# EAGLE board espduino-12 (EAGLE 7.1.0)
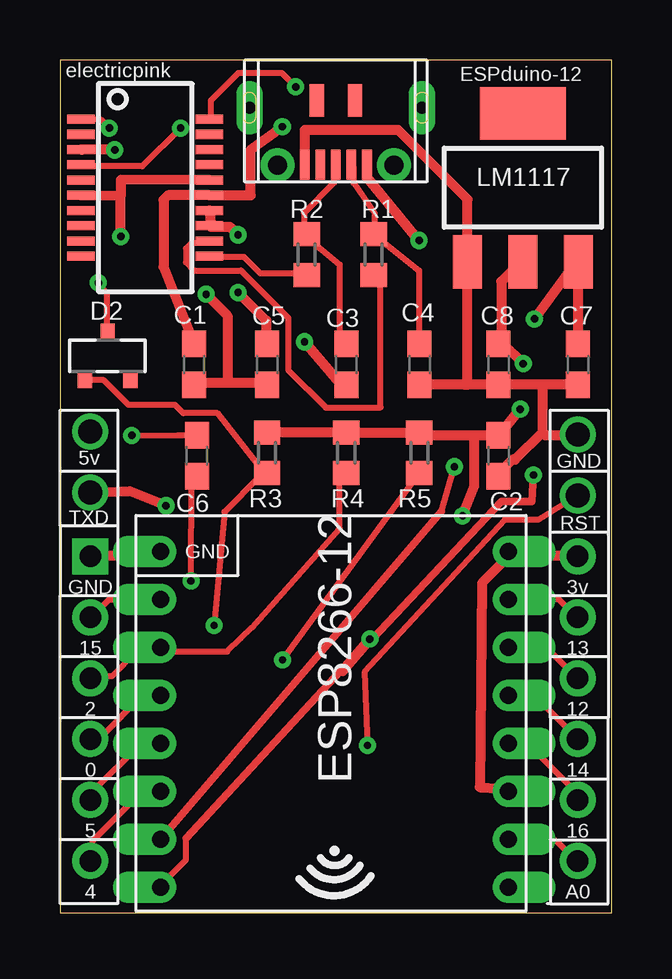
[diagram p0: board, top side]
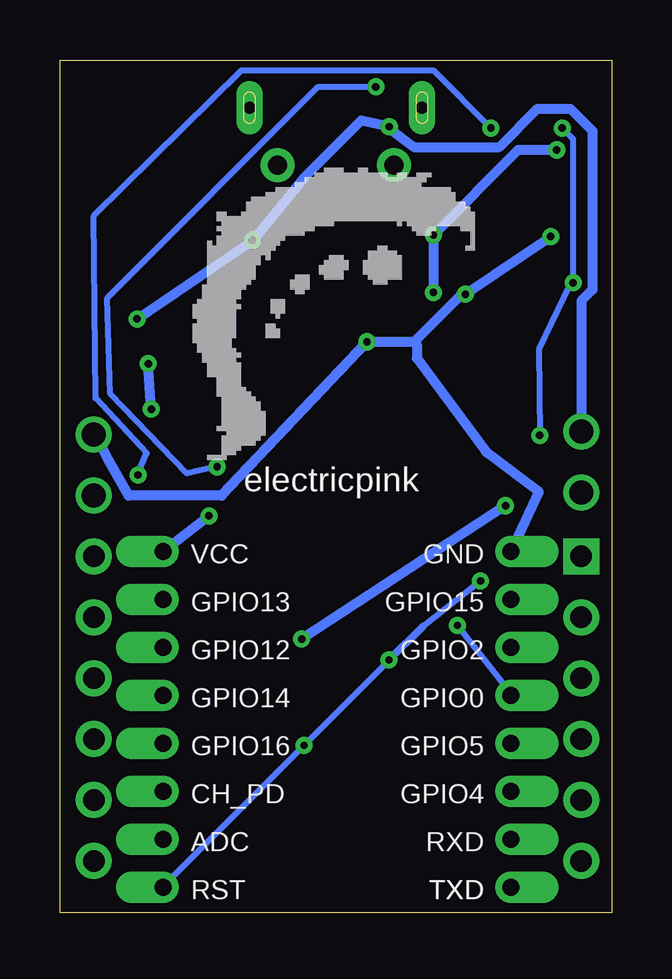
[diagram p1: board, bottom side, seen from below]

Size 23 x 35.55 mm. Coordinates in mm from the lower left corner, seen from the top.
Outline: 0,0 23,0 23,35.55 0,35.55 0,0
Copper layers (1*16): Top 0.035mm / dielectric 1.5mm / Bottom 0.035mm
Design rules "SeeedStudio_2layer_conservative": minimum track width 8mil, minimum drill 12mil, track to track 8mil, track to pad 8mil, pad to pad 8mil, via to via 8mil, smd to smd 0mil, copper to edge 12mil, drill to drill 12mil, minimum pad ring 12mil, minimum via ring 8mil, stop-mask expansion 2mil, vias tented up to drill 100mil, thermal gap 12mil
Net classes: 0 default: width 0.254 mm; 1 POWER: width 0.406 mm

## Footprints (pad centres in the part's own frame; a part is rotated, then mirrored left to right if it is on the bottom)
C0603 = smd 1.1 x 1: 1 -0.85,0; 2 0.85,0
SOT23-R = smd 0.6 x 0.7: 1 -0.95,-1; 2 0.95,-1; 3 0,1
ESP8266-12-EXT-HEADERS = drill 0.711 pad 1.2 offset: ADC 2.895,11.791; CH_PD 2.895,9.791; GND 17.395,-0.209; GPIO0 17.395,5.791; GPIO2 17.395,3.791; GPIO4 17.395,9.791; GPIO5 17.395,7.791; GPIO12 2.895,3.791; GPIO13 2.895,1.791; GPIO14 2.895,5.791; GPIO15 17.395,1.791; GPIO16 2.895,7.791; RESET 2.895,13.791; RX 17.395,11.791; TX 17.395,13.791; VCC 2.895,-0.209 | drill 0.889 pad 1.5: ADC_P 0,12.7; GPIO0_P 20.32,7.62; GPIO2_P 20.32,5.08; GPIO4_P 20.32,12.7; GPIO5_P 20.32,10.16; GPIO12_P 0,5.08; GPIO13_P 0,2.54; GPIO14_P 0,7.62; GPIO15_P 20.32,2.54; GPIO_16_P 0,10.16; VCC_P 0,0 | drill 0.889 pad 1.5 square: GND_P 20.32,0
SOT223 = smd 1.219 x 2.235: 1 -2.311,-3.099; 2 0,-3.099; 3 2.311,-3.099 | smd 3.6 x 2.2: 4 0,3.099
R0603 = smd 1 x 1.1: 1 -0.85,0; 2 0.85,0
SSOP20_L = smd 0.381 x 1.143: 1 -2.857,-2.68; 2 -2.223,-2.68; 3 -1.587,-2.68; 4 -0.953,-2.68; 5 -0.318,-2.68; 6 0.318,-2.68; 7 0.953,-2.68; 8 1.587,-2.68; 9 2.223,-2.68; 10 2.857,-2.68; 11 2.857,2.68; 12 2.223,2.68; 13 1.587,2.68; 14 0.953,2.68; 15 0.318,2.68; 16 -0.318,2.68; 17 -0.953,2.68; 18 -1.587,2.68; 19 -2.223,2.68; 20 -2.857,2.68
MICRO-USB-A01SB141B1 = smd 0.4 x 1.25: D+ 0,-4.375; D- 0.65,-4.375; GND -1.3,-4.375; ID -0.65,-4.375; VCC 1.3,-4.375 | smd 0.6 x 1.35: P$1 -0.8,-1.7; P$2 0.8,-1.7 | drill 0.8: P$8 -2.425,-4.4; P$9 2.425,-4.4 | drill 0.5 pad 1.1 long: P$10 -3.6,-2; P$12 3.6,-2

## Placement (x,y rotation side)
C1  4.7uF  [C0603]  5.59,22.86 270 top
C2  10uF  [C0603]  18.29,19.05 270 top
C3  47pF  [C0603]  11.94,22.86 270 top
C4  47pF  [C0603]  14.99,22.86 270 top
C5  0.1uF  [C0603]  8.64,22.86 270 top
C6  0.1uf  [C0603]  5.71,19.05 90 top
C7  0.1uf  [C0603]  21.59,22.86 270 top
C8  0.1uf  [C0603]  18.29,22.86 270 top
D2  [SOT23-R]  1.99,23.22 0 top
ESP8266-12  ESP8266-12ESP8266-BREAKOUT  [ESP8266-12-EXT-HEADERS]  21.59,14.86 180 top
LM1117  [SOT223]  19.3,30.23 0 top
R1  27  [R0603]  13.08,27.43 270 top
R2  27  [R0603]  10.29,27.43 90 top
R3  10k  [R0603]  8.64,19.18 90 top
R4  10k  [R0603]  11.94,19.18 90 top
R5  10k  [R0603]  14.99,19.18 90 top
U1  FT231XS  [SSOP20_L]  3.56,30.23 270 top
U2  [MICRO-USB-A01SB141B1]  11.5,35.56 0 top
U$2  [JUMPER-LOGO-X-SMALL]  12.7,27.3 0 top

## Library data of the parts
C1-C8 R1-R5 = resistor
D2 = adafruit
ESP8266-12 U2 U$2 = jumper-parts
LM1117 = SparkFun-PowerIC; PROD_ID: VREG-08170
U1 = SparkFun-DigitalIC

## Nets
3.3V [POWER]: C2.1 C8.1 ESP8266-12.CH_PD ESP8266-12.VCC ESP8266-12.VCC_P LM1117.2 R3.2 R4.2 R5.2
5V [POWER]: C1.1 C7.1 LM1117.3 U1.15 U2.VCC
ADC: ESP8266-12.ADC ESP8266-12.ADC_P
CBUS0: U1.18
CBUS3: U1.19
CTS: U1.9
DCD: U1.8
DSR: U1.7
DTR: C6.2 D2.3 U1.1
GND [POWER]: C1.2 C2.2 C3.2 C4.2 C5.2 C7.2 C8.2 ESP8266-12.GND ESP8266-12.GND_P LM1117.1 U1.6 U1.16 U2.GND
GPIO0: D2.1 ESP8266-12.GPIO0 ESP8266-12.GPIO0_P R3.1
GPIO2: ESP8266-12.GPIO2 ESP8266-12.GPIO2_P R4.1
GPIO4: ESP8266-12.GPIO4 ESP8266-12.GPIO4_P
GPIO5: ESP8266-12.GPIO5 ESP8266-12.GPIO5_P
GPIO12: ESP8266-12.GPIO12 ESP8266-12.GPIO12_P
GPIO13: ESP8266-12.GPIO13 ESP8266-12.GPIO13_P
GPIO14: ESP8266-12.GPIO14 ESP8266-12.GPIO14_P
GPIO15: ESP8266-12.GPIO15 ESP8266-12.GPIO15_P
GPIO16: ESP8266-12.GPIO16 ESP8266-12.GPIO_16_P
N$1: R1.2 U1.12
N$2: R2.1 U1.11
N$3: C3.1 R2.2 U2.D+
N$4: C4.1 R1.1 U2.D-
N$5 [POWER]: C5.1 U1.3 U1.13 U1.14
RESET: C6.1 ESP8266-12.RESET R5.1
RI: U1.5
RTS: U1.2
RXD: ESP8266-12.RX U1.20
TXD: ESP8266-12.TX U1.4

## Tracks (layer width: path | path; a pad name or v marks a point on that pad's centre or on a via)
3.3V  (via drill 0.3)
  Top 0.406: ESP8266-12.VCC 18.75,15 19.94,14.8 | ESP8266-12.CH_PD 18.63,5.17 17.5,5.23 17.6,13.74 18.52,14.66 ESP8266-12.VCC | 18.67,14.86 18.63,15 ESP8266-12.VCC | 18.29,23.69 C8.1 | C8.1 18.4,23.8 18.4,26.31 19.2,27.11 LM1117.2 | R3.2 8.46,20.03 11.66,20.03 R4.2 11.89,20.03 14.97,20.03 R5.2 15.09,19.91 17.27,19.91 | 17.27,19.91 C2.1 18.4,20.03 v19.19,20.99 | v19.32,22.89 18.52,23.69 C8.1 | v16.79,16.55 17.27,17.78 17.27,19.91 | ESP8266-12.VCC_P 21.49,14.88 20.12,14.88 ESP8266-12.VCC
  Bottom 0.406: v19.19,20.99 v19.32,22.89 | 18.63,15.11 ESP8266-12.VCC v16.79,16.55
5V  (via drill 0.3, 1)
  Top 0.406: C7.1 21.59,27.13 LM1117.3 21.6,27.23 v19.79,24.75 | v14.97,28.03 12.8,30.66 12.8,31.12 U2.VCC | v9.27,32.77 7.95,31.8 7.95,29.9 7.94,29.91 U1.15 4.51,29.91 4.32,29.72 4.32,26.92 C1.1
  Bottom 0.406: v19.79,24.75 v14.97,28.03 12.8,30.66 10.44,33.02 v9.27,32.77 9.26,32.69 8.23,31.92 4.69,31.92 3.09,33.52 1.71,33.52 0.8,32.6 0.8,25.97 1.26,25.51 1.26,20.14 v1.27,20.07
ADC
  Top 0.254: ESP8266-12.ADC 18.75,3 20.69,3 21.49,2.2 ESP8266-12.ADC_P
DTR  (via drill 0.3)
  Top 0.254: v2.06,32.71 1.71,33.06 0.91,33.06 U1.1 | D2.3 1.94,24.26 1.94,25.86 1.6,26.2 v1.6,26.26 | v3,19.9 4.92,19.91 5.37,19.91 C6.2
  Bottom 0.254: v2.06,32.71 1.6,32.26 v1.6,26.26 1.71,26.2 3.02,23.47 v3,19.9
GND  (via drill 0.3, 1)
  Top 0.406: 16.99,22.01 C8.2 20.12,22.01 | 16.99,22.01 16.87,22.01 14.96,22.01 C4.2 | 16.99,22.01 LM1117.1 16.99,29.74 14.1,32.64 10.21,32.64 10.21,31.19 U2.GND | 20.12,22.01 C7.2 21.72,21.86 | C5.2 8.34,22.09 6.99,22.09 | 4.23,15 ESP8266-12.GND | U1.16 2.54,30.56 2.54,29.9 | U1.6 2.54,29.9 | v6.1,25.78 6.99,24.89 6.99,22.09 | v2.54,28.19 2.54,29.9 | 6.99,22.09 5.6,22.09 | 5.6,22.09 5.59,22.09 | 20.12,20.03 18.97,18.89 18.86,18.89 18.29,18.31 C2.2 | 20.12,22.01 20.12,20.03 | ESP8266-12.GND 4.12,15.11 4.19,14.86 | v10.2,23.8 11.66,22.09 C3.2 | v21.59,19.94 21.49,19.91 20.23,19.91 20.12,20.03 | 5.6,22.09 C1.2 | ESP8266-12.GND 4,14.88 1.37,14.88 ESP8266-12.GND_P
  Bottom 0.406: v2.54,28.19 v6.1,25.78 6.29,25.74 8.23,23.8 | 8.23,23.8 v10.2,23.8 16.26,17.39 20.14,17.39 20.98,18.89 21.49,19.91 v21.59,19.94 | ESP8266-12.GND 3.04,17.55 5.22,19.2 8.12,23.11 8.12,23.69 8.23,23.8
GPIO0  (via drill 0.3)
  Top 0.254: D2.1 1.14,22.2 1.83,22.2 2.86,21.17 4.8,21.17 5.14,20.83 6.57,20.83 8.46,18.43 R3.1 8.34,18.2 6.86,16.71 v6.43,11.98 | ESP8266-12.GPIO0_P 1.37,7.34 1.71,7.34 3.43,9.05 4.12,9.05 ESP8266-12.GPIO0
  Bottom 0.254: v6.43,11.98 4.23,9.17 ESP8266-12.GPIO0
GPIO2
  Top 0.254: 4.23,10.88 ESP8266-12.GPIO2 | R4.1 11.66,18.31 11.66,16.03 8,11.89 7.54,11.46 6.97,10.88 4.34,10.88 ESP8266-12.GPIO2 | ESP8266-12.GPIO2_P 1.37,9.86 2.17,9.86 3.2,10.88 4.12,10.88 ESP8266-12.GPIO2
GPIO4
  Top 0.254: ESP8266-12.GPIO4 4.12,5.05 3.43,5.05 1.37,3 1.37,2.2 ESP8266-12.GPIO4_P
GPIO5
  Top 0.254: ESP8266-12.GPIO5 4.12,7 3.31,7 1.37,5.05 1.37,4.71 ESP8266-12.GPIO5_P
GPIO12
  Top 0.254: ESP8266-12.GPIO12 18.75,11 20.34,11 21.49,9.86 ESP8266-12.GPIO12_P
GPIO13
  Top 0.254: ESP8266-12.GPIO13 18.75,13.06 20.8,13.06 21.49,12.37 ESP8266-12.GPIO13_P
GPIO14
  Top 0.254: ESP8266-12.GPIO14_P 19.77,9.05 18.75,9.05 ESP8266-12.GPIO14
GPIO15
  Top 0.254: ESP8266-12.GPIO15 4.12,13.06 2.06,13.06 1.37,12.37 ESP8266-12.GPIO15_P
GPIO16
  Top 0.254: ESP8266-12.GPIO16 18.75,7 19.55,7 21.49,5.05 21.49,4.71 ESP8266-12.GPIO_16_P
N$1
  Top 0.254: R1.2 13.37,26.54 13.37,21.07 12.34,21.06 11.09,21.06 9.51,22.63 9.51,24.8 7.54,26.77 5.6,26.77 5.26,27.11 5.26,27.69 5.49,27.92 6.17,27.92 U1.12
N$2
  Top 0.254: R2.1 10.06,26.66 8.34,26.66 7.66,27.34 6.29,27.34 U1.11
N$3
  Top 0.254: U2.D+ 11.43,31.12 11.43,30.43 10.17,29.17 10.17,28.37 R2.2 10.17,28.26 11.66,27.03 11.66,24.05 C3.1
N$4
  Top 0.254: U2.D- 12.23,31.12 12.23,30.43 13.12,29.16 13.12,28.25 R1.1 13.11,28.26 14.97,26.77 14.97,23.8 C4.1
N$5  (via drill 0.3)
  Top 0.406: v7.43,25.86 8.6,24.69 8.6,23.55 C5.1 | v7.43,28.26 7.09,28.6 6.29,28.6 U1.13 6.29,28.83 6.29,29.17 U1.14 | v2.29,31.8 0.91,31.8 U1.3
  Bottom 0.406: v7.43,25.86 v7.43,28.26 3.89,31.8 v2.29,31.8
RESET  (via drill 0.3, 1)
  Top 0.254: v5.46,13.83 5.49,18.2 C6.1 | v9.28,10.54 14.97,18.31 R5.1 | v21.59,17.4 19.94,16.38 18.54,16.38 12.7,10.03 v12.82,6.98
  Bottom 0.254: v12.82,6.98 18.63,1.17 ESP8266-12.RESET | v12.82,6.98 7.87,11.93 v5.46,13.83 | v12.82,6.98 11.68,8.12
  Bottom 0.305: v9.28,10.54 7.87,11.93
RXD  (via drill 0.3)
  Top 0.254: v9.83,34.43 9.26,35 7.43,35 6.29,33.86 6.29,33.17 U1.20 | 15.91,16.73 v16.45,18.59
  Top 0.305: 15.91,16.73 ESP8266-12.RX
  Bottom 0.254: v9.83,34.43 12.23,34.43 21.03,25.63 20.9,21.63 17.72,18.31 v16.45,18.59
TXD  (via drill 0.3, 1)
  Top 0.254: v5.03,32.71 3.43,31.12 0.91,31.12 U1.4 | 5.26,3.11 5.26,2.2 4.23,1.17 ESP8266-12.TX
  Top 0.305: v19.75,18.25 19.68,17.14 18.41,17.14 11.79,10.08 | v12.92,11.41 5.26,3.11
  Top 0.406: v1.27,17.53 2.92,17.58 v4.42,16.97 | v12.92,11.41 11.79,10.08
  Bottom 0.254: v5.03,32.71 7.43,35.11 15.43,35.11 21.59,29.06 21.51,21.45 19.38,19.16 19.63,18.58 v19.75,18.25
  Bottom 0.406: v4.42,16.97 v12.92,11.41

## Text on the board
tNames: electricpink | ESPduino-12 | 5v | GND | TXD | RST
bNames: electricpink